# Altium PCB PCB1.PcbDoc
Units mm, origin at the board's own origin, x right, y up, seen from the top; angles counter-clockwise.
Board outline 132.33 x 70 mm, 4 copper layers (Top Layer, Int1 (GND), Int2 (PWR), Bottom Layer), stack 1.369 mm thick; 21 components, 21 nets, 100 pads, 4 vias.
Unrouted connection lines stored in the file: 185.
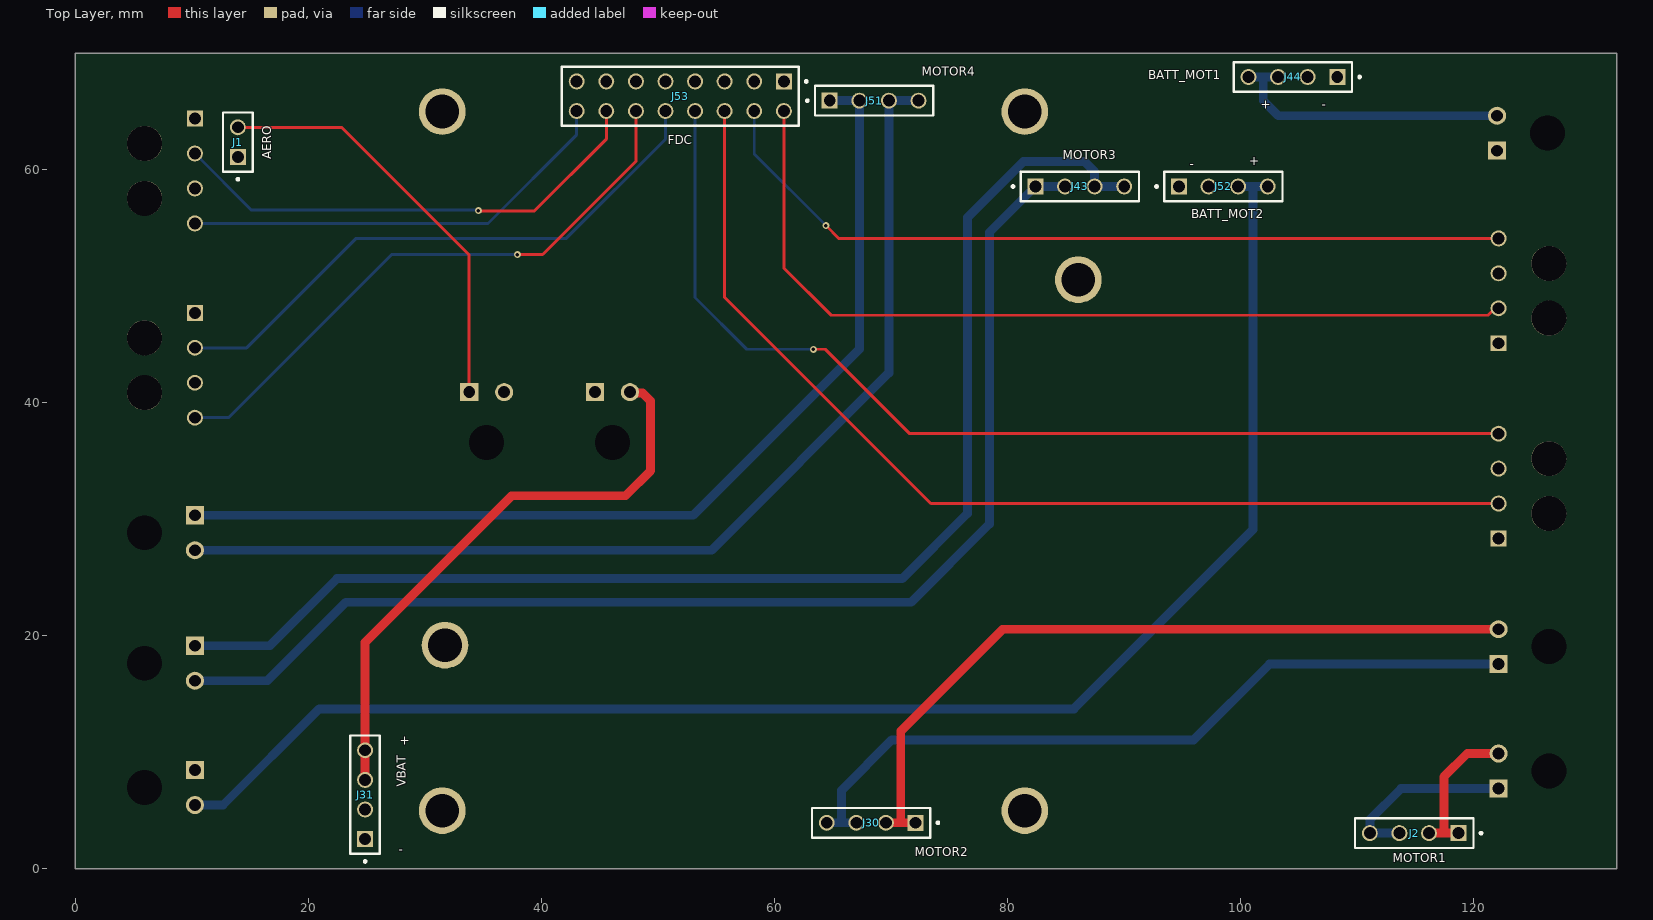
[diagram p0: Top Layer view]
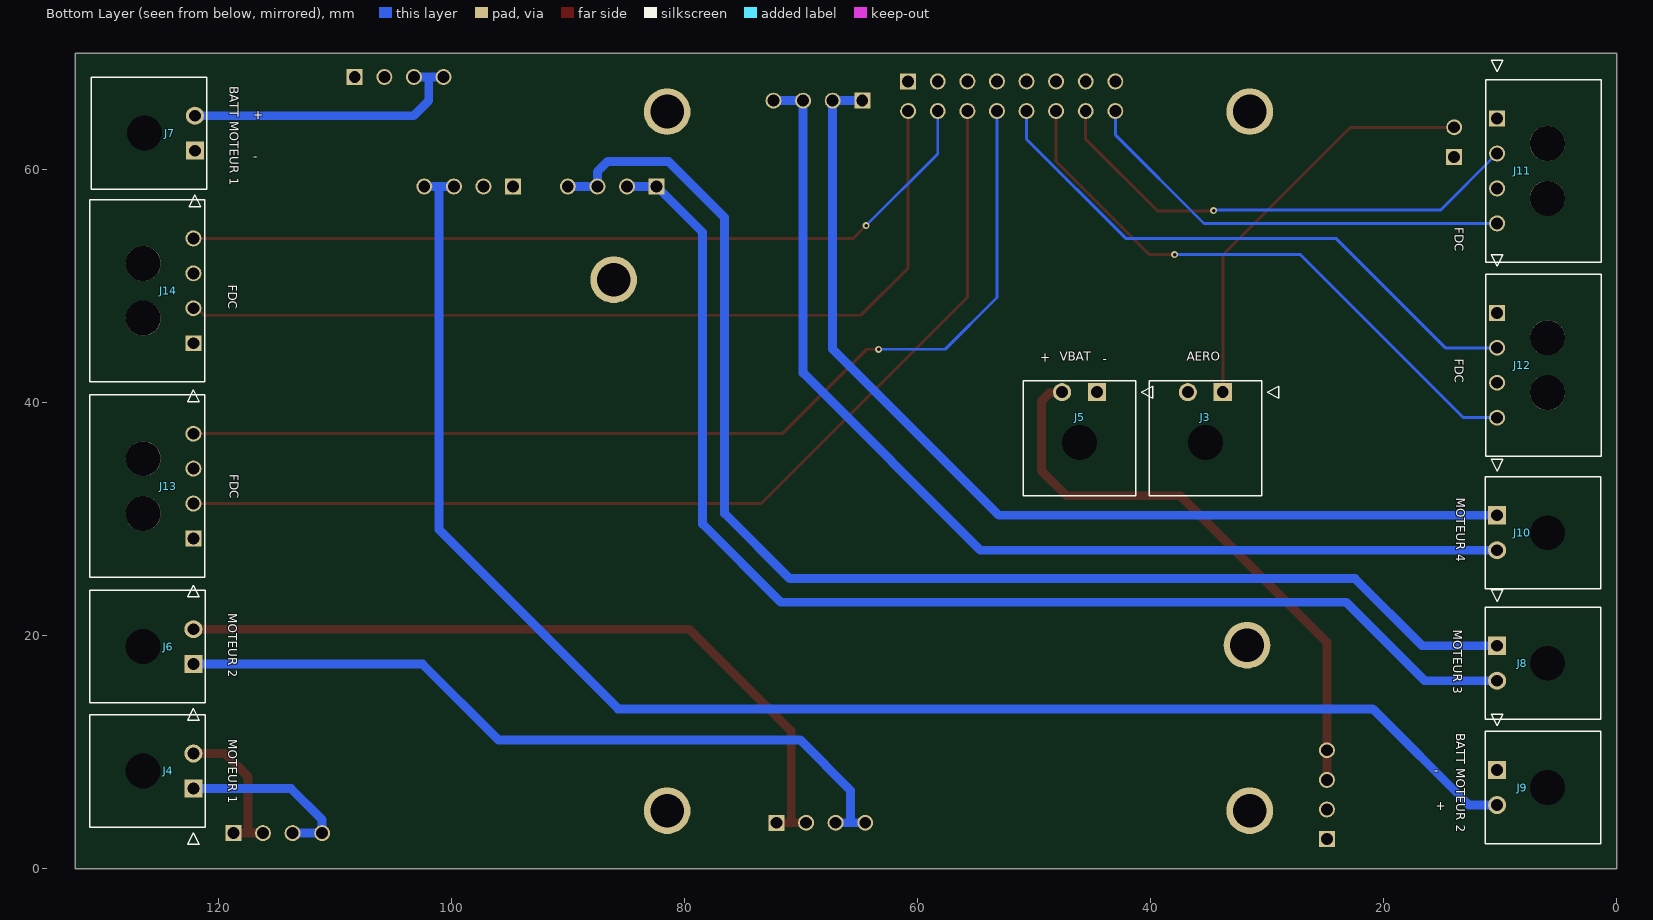
[diagram p1: Bottom Layer view, seen from below]
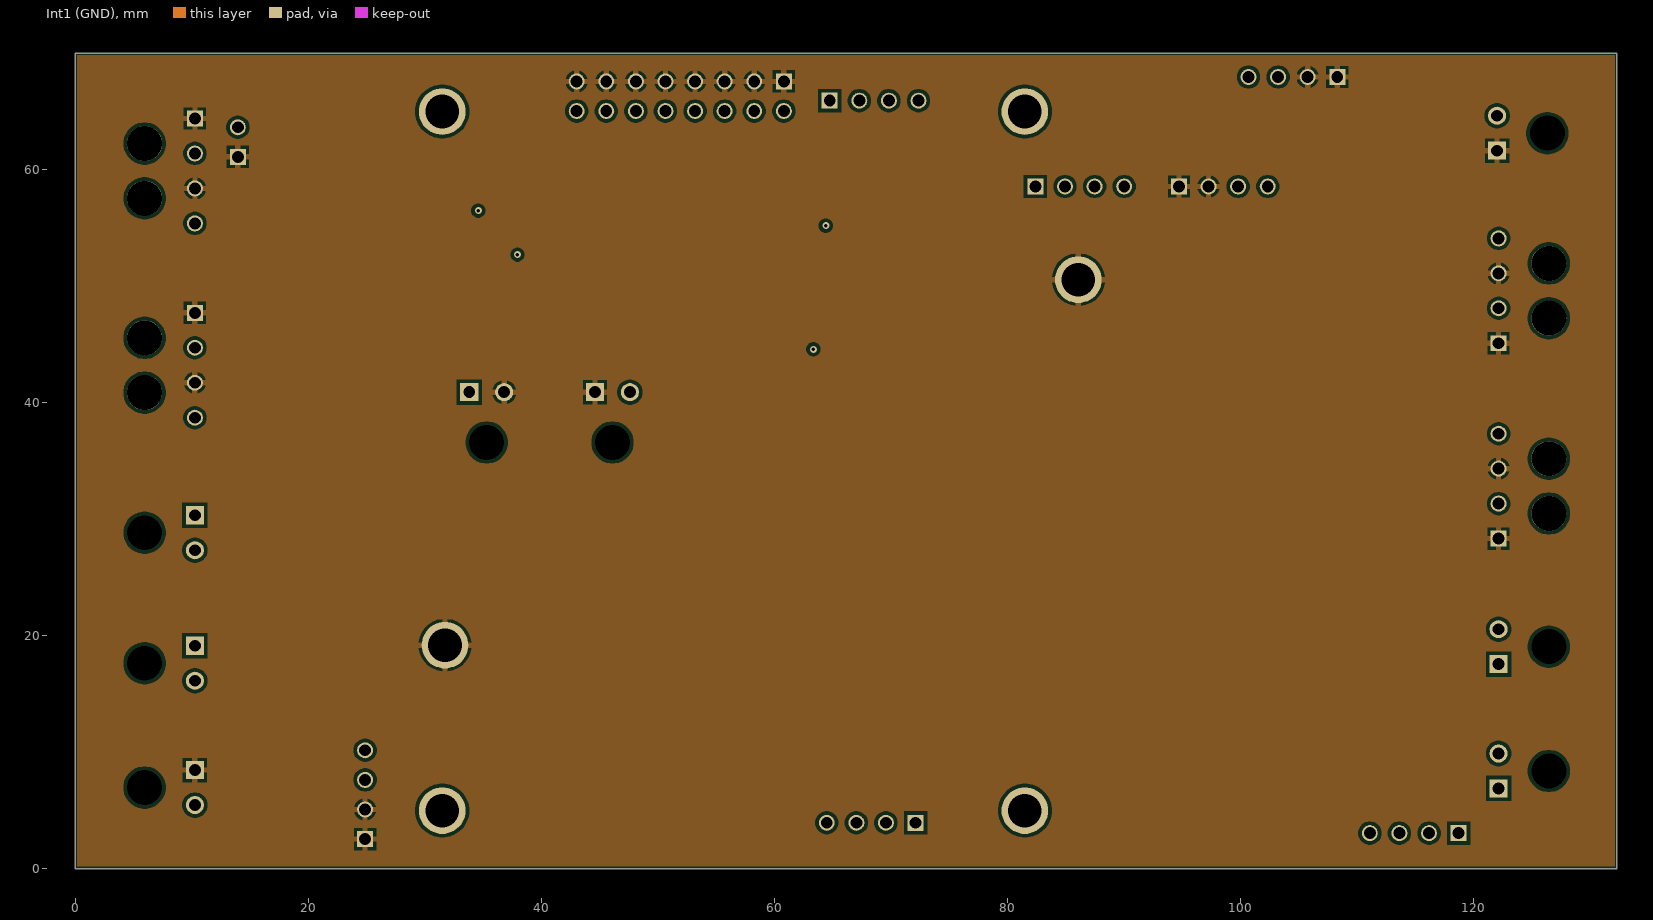
[diagram p2: Int1 (GND)]
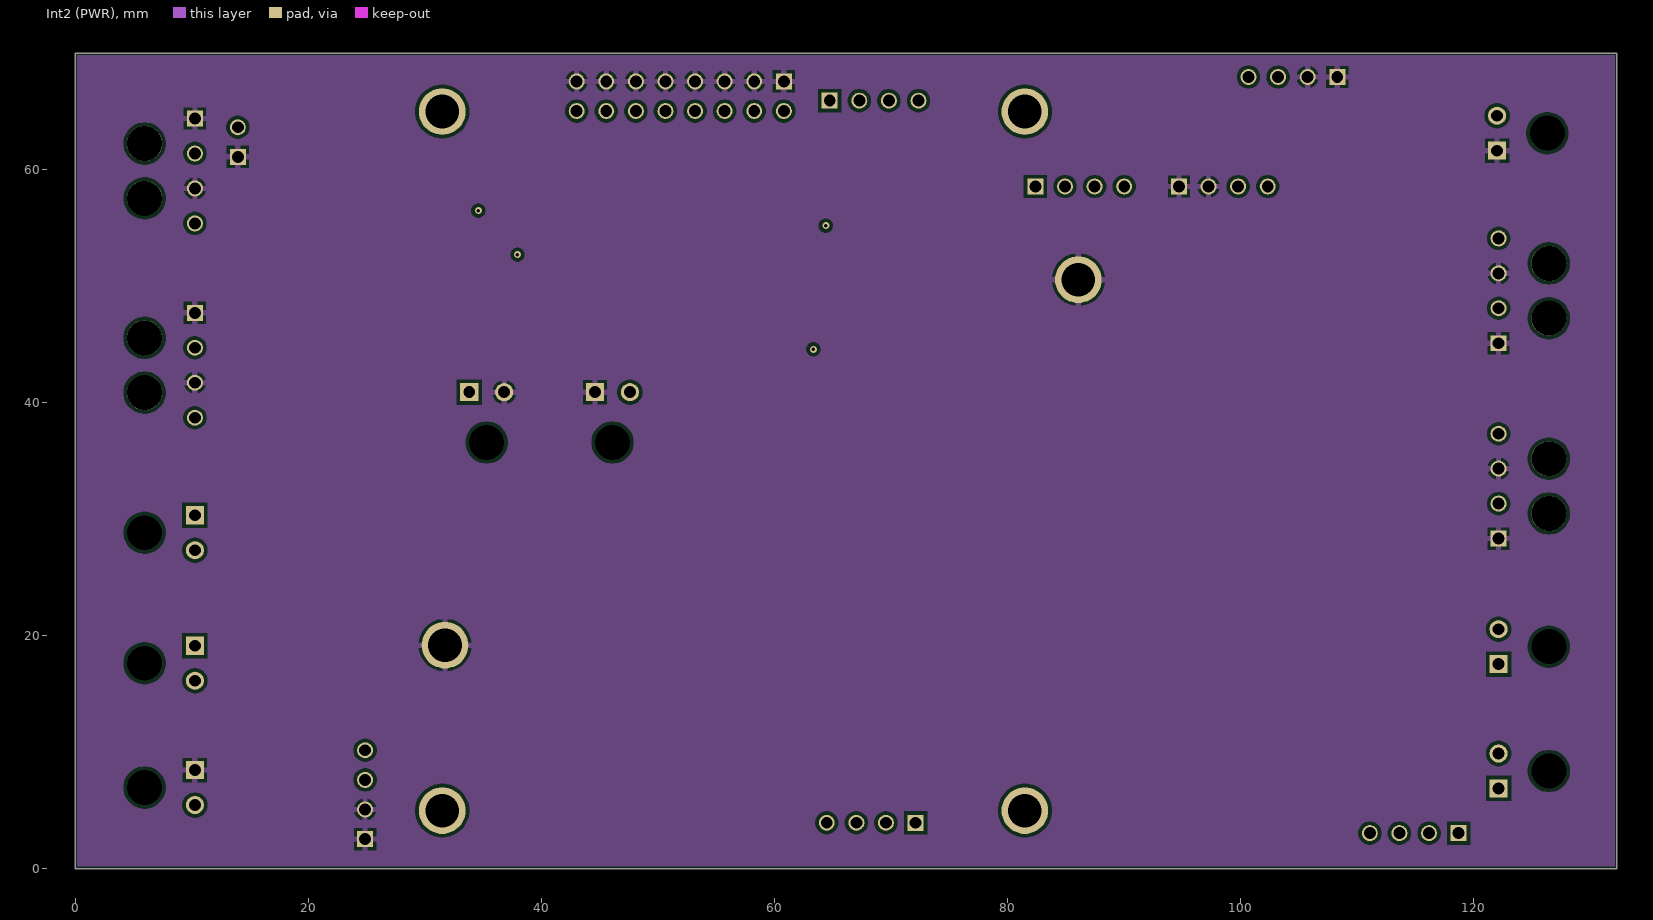
[diagram p3: Int2 (PWR)]
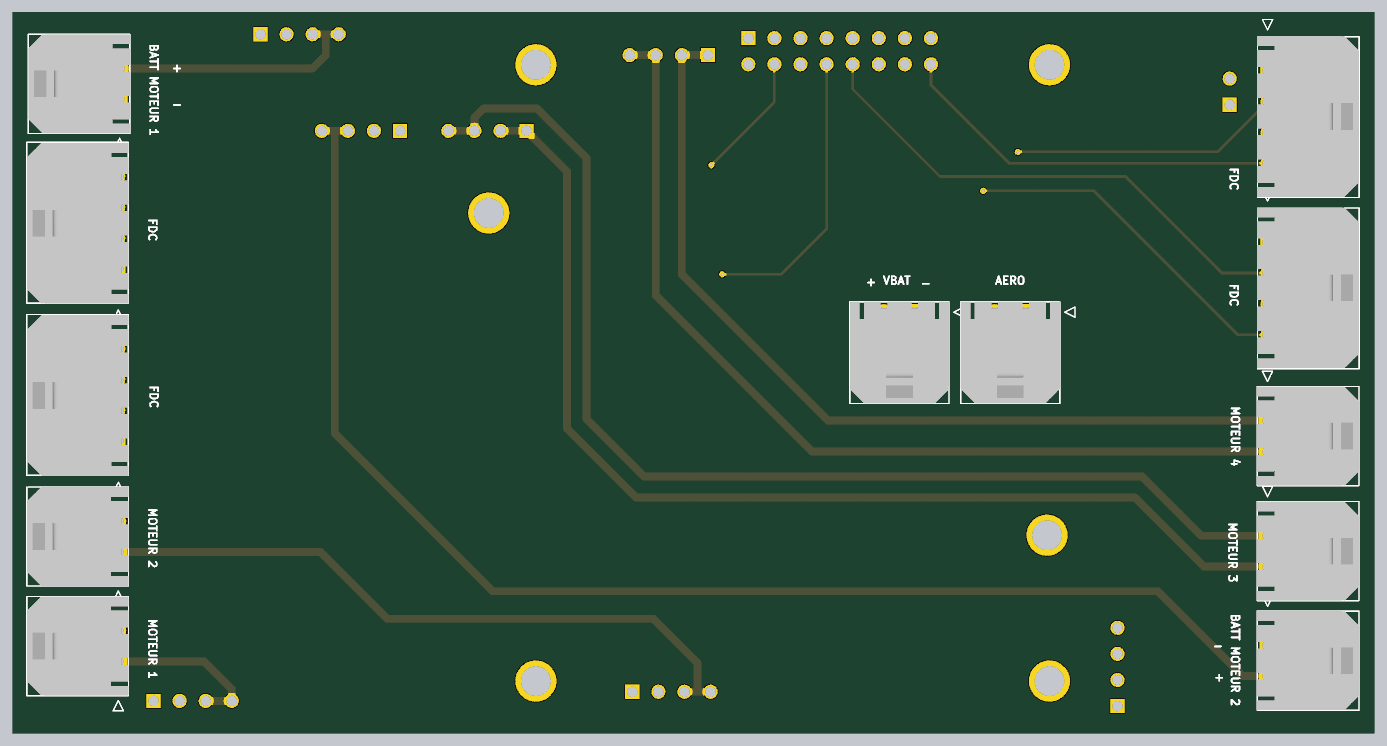
[diagram p4: 3D render of the assembled board from below, using the file's embedded part models]

## Layer stack, top to bottom
Top Solder: solder mask 0.0254, SM-001, Dk 4
Top Layer: signal copper 0.035
Dielectric 1: prepreg 0.1295, PP-017, Dk 4.3
Dielectric 2: prepreg 0.1295, PP-017, Dk 4.3
Int1 (GND): signal copper 0.035
Dielectric 3: core 0.7112, Core-039, Dk 4.8
Int2 (PWR): signal copper 0.035
Dielectric 4: prepreg 0.1295, PP-017, Dk 4.3
Dielectric 5: prepreg 0.1295, PP-017, Dk 4.3
Bottom Layer: signal copper 0.035
Bottom Solder: solder mask 0.0254, SM-001, Dk 4

## Board outline
0,0 0,70 132.334,70 132.334,0

## Design rules (kind name [scope] priority, off if disabled: settings)
BoardOutlineClearance [All] p1: gap=0.2 ignorepadtopadclearanceinfootprint=FALSE
Clearance HF_1 [InNetClass('HF')] p1: gap=0.3 ignorepadtopadclearanceinfootprint=TRUE except(0.127: SMDPad-SMDPad; 0.2: Arc-Arc Arc-Track Arc-SMDPad Arc-THPad Track-Track Track-SMDPad Track-THPad; 0.254: Arc-Via Track-Via; 0.33: Arc-Hole Track-Hole; 0.5: THPad-THPad)
Clearance [All] p2: gap=0.3 ignorepadtopadclearanceinfootprint=TRUE except(0.089: Arc-Arc Arc-Track Track-Track; 0.127: SMDPad-SMDPad; 0.2: Arc-SMDPad Arc-THPad Track-SMDPad Track-THPad; 0.254: Arc-Via Track-Via; 0.33: Arc-Hole Track-Hole; 0.5: THPad-THPad)
DiffPairsRouting [All] p1 off: maxlimit=0.254 minlimit=0.254 mostfreqgap=0.254 toplayer_minwidth=0.381 toplayer_maxwidth=0.381 toplayer_prefwidth=0.381 midlayer1_minwidth=0.381 midlayer1_maxwidth=0.381 midlayer1_prefwidth=0.381 midlayer3_minwidth=0.381 midlayer3_maxwidth=0.381 midlayer3_prefwidth=0.381 bottomlayer_minwidth=0.381 bottomlayer_maxwidth=0.381 bottomlayer_prefwidth=0.381 maxuncoupledlength=12.7
HoleSize [All] p1: absolutevalues=TRUE maxlimit=6.3 minlimit=0.2 maxpercent=80.000 minpercent=20.000
HoleToHoleClearance [All] p1: gap=0.5 allowstackedmicrovias=TRUE
MatchedLengths MatchLengths_xSignals_U4_U3 [InxSignalClass('xSignals_U4_U3_MatchLengthsClass')] p1: tolerance=2.54 checknetsindiffpair=FALSE checkdiffpairvsdiffpair=TRUE checkxsignals=TRUE checkothers=TRUE
MatchedLengths MatchLengths_xSignals_P1_U4 [InxSignalClass('xSignals_P1_U4_MatchLengthsClass')] p2: tolerance=2.54 checknetsindiffpair=FALSE checkdiffpairvsdiffpair=TRUE checkxsignals=TRUE checkothers=TRUE
MatchedLengths MatchLengths_xSignals_U4_U5 [InxSignalClass('xSignals_U4_U5_MatchLengthsClass')] p3: tolerance=2.54 checknetsindiffpair=FALSE checkdiffpairvsdiffpair=TRUE checkxsignals=TRUE checkothers=TRUE
MatchedLengths MatchLengths_xSignals_U11_U4_2 [InxSignalClass('xSignals_U11_U4_MatchLengthsClass_2')] p4: tolerance=2.54 checknetsindiffpair=FALSE checkdiffpairvsdiffpair=TRUE checkxsignals=TRUE checkothers=TRUE
MatchedLengths MatchLengths_xSignals_U11_U4_1 [InxSignalClass('xSignals_U11_U4_MatchLengthsClass_1')] p5: tolerance=2.54 checknetsindiffpair=FALSE checkdiffpairvsdiffpair=TRUE checkxsignals=TRUE checkothers=TRUE
MatchedLengths MatchLengths_xSignals_U11_U4 [InxSignalClass('xSignals_U11_U4_MatchLengthsClass')] p6: tolerance=2 checknetsindiffpair=FALSE checkdiffpairvsdiffpair=TRUE checkxsignals=TRUE checkothers=TRUE
MatchedLengths MatchLengths_xSignals_J79_U4 [InxSignalClass('xSignals_J79_U4_MatchLengthsClass')] p7: tolerance=2 checknetsindiffpair=FALSE checkdiffpairvsdiffpair=TRUE checkxsignals=TRUE checkothers=TRUE
MatchedLengths MatchLengths_xSignals_U2_U4 [InxSignalClass('xSignals_U2_U4_MatchLengthsClass')] p8: tolerance=2 checknetsindiffpair=FALSE checkdiffpairvsdiffpair=TRUE checkxsignals=TRUE checkothers=TRUE
MatchedLengths MatchLengths_xSignals_SD1_U4 [InxSignalClass('xSignals_SD1_U4_MatchLengthsClass')] p9: tolerance=2 checknetsindiffpair=FALSE checkdiffpairvsdiffpair=TRUE checkxsignals=TRUE checkothers=TRUE
MatchedLengths MatchLengths_xSignals_SD_1 [InxSignalClass('xSignals_U3_U4_MatchLengthsClass')] p10: tolerance=2.54 checknetsindiffpair=FALSE checkdiffpairvsdiffpair=TRUE checkxsignals=TRUE checkothers=TRUE usedelayunits=TRUE delaytolerance=50.000000
MatchedLengths MatchLengths_U3_Passives_U4 [InxSignalClass('xSignals_U3_Passives_U4_MatchLengthsClass')] p11: tolerance=1.27 checknetsindiffpair=FALSE checkdiffpairvsdiffpair=TRUE checkxsignals=TRUE checkothers=TRUE
MatchedLengths MatchLengths_xSignals_U3_Passives [InxSignalClass('xSignals_U3_Passives_MatchLengthsClass')] p12: tolerance=1.27 checknetsindiffpair=FALSE checkdiffpairvsdiffpair=TRUE checkxsignals=TRUE checkothers=TRUE
MatchedLengths MatchLengths_xSignals_SD [InxSignalClass('xSignals_SD_MatchLengthsClass')] p13: tolerance=2.54 checknetsindiffpair=FALSE checkdiffpairvsdiffpair=TRUE checkxsignals=TRUE checkothers=TRUE
PlaneConnect [All] p1: planeconnectstyle=Relief reliefexpansion=0.508 reliefentries=4 reliefconductorwidth=0.75 reliefairgap=0.254
PolygonConnect PolygonConnect_1 [InNet('HOT_L_MOTOR1') Or  InNet('HOT_L_MOTOR2') Or  InNet('HOT_L_MOTOR3') Or  InNet('HOT_L_MOTOR4')  Or  InNet('HOT_R_MOTOR1')  Or  InNet('HOT_R_MOTOR2')Or  InNet('HOT_R_MOTOR3') Or  InNet('HOT_R_MOTOR4')Or  InNet('VCC_PWR_MOTOR1')    Or  InNet('VCC_PWR_MOTOR3')] p1: thpad.connectstyle=Direct thpad.reliefconductorwidth=0.5 thpad.reliefentries=4 thpad.polygonreliefangle="90 Angle" thpad.airgapwidth=0.254 smdpad.connectstyle=Direct smdpad.reliefconductorwidth=0.5 smdpad.reliefentries=4 smdpad.polygonreliefangle="90 Angle" smdpad.airgapwidth=0.254 via.connectstyle=Relief via.reliefconductorwidth=0.5 via.reliefentries=4 via.polygonreliefangle="90 Angle" via.airgapwidth=0.254
PolygonConnect [All] p2: connectstyle=Relief reliefconductorwidth=0.5 reliefentries=4 polygonreliefangle="90 Angle" airgapwidth=0.254
RoutingVias [All] p1: holewidth=0.3 width=0.6 viastyle="Through Hole" minholewidth=0.2 minwidth=0.4 maxholewidth=0.3 maxwidth=0.6
SolderMaskExpansion [All] p1: expansion=0.102 istentingtop=FALSE
UnRoutedNet [All] p1: checkbadconnections=TRUE
Width HF [InNetClass('HF')] p1: maxlimit=0.159 minlimit=0.156 preferedwidth=0.159 toplayer_maxwidth=0.156 toplayer_prefwidth=0.156 midlayer1_minwidth=0.159 bottomlayer_maxwidth=0.156 bottomlayer_prefwidth=0.156 impedanceprofiledriven=TRUE minimp=50.000000 maximp=50.000000 favimp=50.000000
Width PWR [InNetClass('PWR')] p2: maxlimit=0.762 minlimit=0.254 preferedwidth=0.762
Width [All] p3: maxlimit=0.254 minlimit=0.089 preferedwidth=0.254
25 further rules are at their usual default settings.

## Classes and differential pairs
net class PWR: +VBAT +VBAT_MOTOR1 +VBAT_MOTOR2 GND MOT1H_CONN MOT1L_CONN MOT2H_CONN MOT2L_CONN MOT3H_CONN MOT3L_CONN MOT4H_CONN MOT4L_CONN

## Components (designator, comment, footprint, x,y, rotation, side; value= is the part's Value field where it differs from the comment)
J1 "TSW-102-05-G-S" SAMTEC_TSW-102-05-G-S 13.97,61.087 r90 top locked
J2 "TSW-104-05-T-S" SAMTEC_TSW-104-05-T-S 118.745,3.048 r180 top locked
J3 "436500200" 4365002YY_4 33.83,40.894 r180 bottom
J4 "436500200" 4365002YY_4 122.172,6.882 r270 bottom
J5 "436500200" 4365002YY_4 44.625,40.894 r180 bottom
J6 "436500200" 4365002YY_4 122.172,17.55 r270 bottom
J7 "436500200" 4365002YY_4 122.045,61.619 r270 bottom
J8 "436500200" 4365002YY_4 10.287,19.129 r90 bottom
J9 "436500200" 4365002YY_4 10.287,8.461 r90 bottom
J10 "436500200" 4365002YY_4 10.289,30.329 r90 bottom
J11 "43650-0400" 43650-04YY_R 10.289,64.381 r90 bottom
J12 "43650-0400" 43650-04YY_R 10.287,47.704 r90 bottom
J13 "43650-0400" 43650-04YY_R 122.172,28.33 r270 bottom
J14 "43650-0400" 43650-04YY_R 122.172,45.094 r270 bottom
J30 "TSW-104-05-T-S" SAMTEC_TSW-104-05-T-S 72.136,3.937 r180 top locked
J31 "TSW-104-05-T-S" SAMTEC_TSW-104-05-T-S 24.892,2.54 r90 top locked
J43 "TSW-104-05-T-S" SAMTEC_TSW-104-05-T-S 82.423,58.547 r0 top locked
J44 "TSW-104-05-T-S" SAMTEC_TSW-104-05-T-S 108.331,67.945 r180 top locked
J51 "TSW-104-05-T-S" SAMTEC_TSW-104-05-T-S 64.77,65.913 r0 top locked
J52 "TSW-104-05-T-S" SAMTEC_TSW-104-05-T-S 94.742,58.547 r0 top locked
J53 "TSW-108-05-G-D" SAMTEC_TSW-108-05-G-D 60.833,67.564 r180 top locked

## Footprints (in the part's own frame and the unit in brackets; to place one, negate y for a bottom-side part, rotate by r counter-clockwise, add the part's x,y. Pads: shape width x height; smd on the part's side, far side on the other; paste and mask are expansions set on the pad)
43650-04YY_R [mm]
  rect 1.37x1.37 hole 1.02: 1(0,0)
  round 1.37 hole 1.02: 2(-3,0) 3(-6,0) 4(-9,0)
  round 3 hole 3 unplated: 5(-2.15,-4.32) 6(-6.85,-4.32)
  silkscreen extent -12.32,-8.92 5,0.98, body extent -12.27,-8.88 3.38,1.02, height 5.47
4365002YY_4 [mm]
  rect 1.55x1.55 hole 1.02: 1(0,0)
  round 1.55 hole 1.02: 2(-3,0)
  round 1.5 hole 3 unplated: 3(-1.5,-4.32)
  silkscreen extent -6.32,-8.9 4.8,1, body extent -6.32,-8.89 3.32,1.01, height 5.68
SAMTEC_TSW-102-05-G-S [mm]
  rect 1.37x1.37 hole 1.02: 01(0,0)
  round 1.37 hole 1.02: 02(2.54,0)
  silkscreen extent -2.02,-1.27 3.81,1.27
SAMTEC_TSW-104-05-T-S [mm]
  rect 1.37x1.37 hole 1.02: 01(0,0)
  round 1.37 hole 1.02: 02(2.54,0) 03(5.08,0) 04(7.62,0)
  silkscreen extent -2.02,-1.27 8.89,1.27
SAMTEC_TSW-108-05-G-D [mm]
  rect 1.37x1.37 hole 1.02: 01(0,0)
  round 1.37 hole 1.02: 02(0,2.54) 03(2.54,0) 04(2.54,2.54) 05(5.08,0) 06(5.08,2.54) 07(7.62,0) 08(7.62,2.54) 09(10.16,0) 10(10.16,2.54) 11(12.7,0) 12(12.7,2.54) 13(15.24,0) 14(15.24,2.54) 15(17.78,0) 16(17.78,2.54)
  silkscreen extent -2.02,-1.27 19.05,3.81

## Part data
J1 J2 J30 J31 J43 J44 J51 J52 J53: Package=None, Availability=Unavailable, Price=None
  J1: MF="{'manufacturer': u'Samtec Inc.'}", MP=TSW-102-05-G-S
  J2 J30 J31 J43 J44 J51 J52: MF="{'manufacturer': u'Samtec'}", MP=TSW-104-05-T-S
  J53: MF="{'manufacturer': u'Samtec'}", MP=TSW-108-05-G-D
J3 J4 J5 J6 J7 J8 J9 J10: "Connector", Manufacturer_Name=Molex, Datasheet Link=https://www.molex.com/pdm_docs/sd/436500200_sd.pdf, Height=13.56mm, Manufacturer_Part_Number=436500200
J11 J12 J13 J14: "Connector", Manufacturer_Name=Molex, Mouser Part Number=538-43650-0400, Datasheet Link=https://www.molex.com/pdm_docs/sd/436500200_sd.pdf, Height=5.57mm, Manufacturer_Part_Number=43650-0400, Mouser Price/Stock=https://www.mouser.co.uk/ProductDetail/Molex/43650-0400?qs=A%252B%2FNCR0PvNV09lp6LzdRYg%3D%3D

## Free pads (board coordinates)
  round 4 hole 2.9: MECA2(31.515,64.977) MECA3(81.515,64.977) MECA6(31.515,4.977) MECA7(81.515,4.977) MECA8(86.106,50.546) MECA9(31.75,19.177)

## Via types
v1: diameter 0.6, hole 0.3, Top Layer to Bottom Layer, 4 vias

## Nets (pads, with @x,y where several pads share a name; then routed paths per layer and width w, separated by ;. In a path a pad name is that pad's centre, name@x,y a point inside that pad or via, vN(x,y) a via of type N, cw(c..) or ccw(c..) an arc to the next point about the centre after c; other vN are vias at no path point)
+VBAT: J5.2 J31.03 J31.04 | length 50.5
  Top Layer w0.762: J31.03 J31.04 24.892,19.431 37.465,32.004 47.244,32.004 49.403,34.163 49.403,40.132 48.727,40.808 47.711,40.808 J5.2
+VBAT_MOTOR1: J7.2 J44.03 J44.04 | length 25.2
  Bottom Layer w0.762: J44.04 101.981,67.945 ; J44.03 101.981,67.945 ; J7.2 103.275,64.619 101.981,65.913 101.981,67.945
+VBAT_MOTOR2: J9.2 J52.03 J52.04 | length 132.6
  Bottom Layer w0.762: J9.2 12.7,5.461 20.955,13.716 85.725,13.716 101.092,29.083 101.092,58.465 101.174,58.547 ; J52.03 99.987,58.547 101.174,58.547 ; J52.04 101.174,58.547
AERO_CON: J1.02 J3.1 | length 36.2
  Top Layer w0.254: J1.02 22.86,63.627 33.83,52.657 J3.1
FDC1_CONN: J11.4 J53.16 | length 37.9
  Bottom Layer w0.254: J11.4 35.442,55.381 43.053,62.992 J53.16
FDC2_CONN: J11.2 J53.14 | length 42.3
  Top Layer w0.254: v1(34.605,56.483) 34.653,56.435 39.417,56.435 45.593,62.611 J53.14
  Bottom Layer w0.254: J11.2 15.155,56.515 34.573,56.515 v1(34.605,56.483)
FDC3_CONN: J12.4 J53.12 | length 51.3
  Top Layer w0.254: v1(37.973,52.705) 40.132,52.705 48.133,60.706 J53.12
  Bottom Layer w0.254: J12.4 13.177,38.704 27.178,52.705 v1(37.973,52.705)
FDC4_CONN: J12.2 J53.10 | length 50.2
  Bottom Layer w0.254: J12.2 14.732,44.704 24.13,54.102 42.164,54.102 50.673,62.611 J53.10
FDC5_CONN: J13.4 J53.08 | length 89.9
  Top Layer w0.254: v1(63.373,44.577) 64.389,44.577 71.636,37.33 J13.4
  Bottom Layer w0.254: J53.08@53.077,65.024 J53.08 53.213,49.022 57.658,44.577 v1(63.373,44.577)
FDC6_CONN: J13.2 J53.06 | length 89.7
  Top Layer w0.254: J53.06 55.753,49.022 73.445,31.33 J13.2
FDC7_CONN: J14.4 J53.04 | length 70.6
  Top Layer w0.254: v1(64.439,55.192) 65.537,54.094 J14.4
  Bottom Layer w0.254: J53.04 58.293,61.341 64.439,55.195 v1(64.439,55.192)
FDC8_CONN: J14.2 J53.02 | length 76.9
  Top Layer w0.254: J53.02 60.833,51.562 64.897,47.498 121.274,47.498 121.87,48.094 J14.2
  Bottom Layer w0.254: J53.02@60.833,64.897 J53.02
GND: J1.01 J3.2 J5.1 J7.1 J9.1 J11.1 J11.3 J12.1 J12.3 J13.1 J13.3 J14.1 J14.3 J31.01 J31.02 J44.01 J44.02 J52.01 J52.02 J53.01 J53.03 J53.05 J53.07 J53.09 J53.11 J53.13 J53.15 pad.MECA8 pad.MECA9
MOT1H_CONN: J2.03 J2.04 J4.1 | length 15.8
  Bottom Layer w0.762: J2.03 J2.04 111.125,4.191 113.816,6.882 J4.1
MOT1L_CONN: J2.01 J2.02 J4.2 | length 12.9
  Top Layer w0.762: J2.02 117.475,3.048 ; J2.01 117.475,3.048 ; J4.2 119.483,9.882 117.475,7.874 117.475,3.048
MOT2H_CONN: J6.1 J30.03 J30.04 | length 66.2
  Bottom Layer w0.762: J30.04 65.786,3.937 ; J30.03 65.786,3.937 ; J6.1 102.513,17.55 96.012,11.049 70.104,11.049 65.786,6.731 65.786,3.937
MOT2L_CONN: J6.2 J30.01 J30.02 | length 65.3
  Top Layer w0.762: J30.02 70.866,3.937 ; J30.01 70.866,3.937 ; J6.2 79.605,20.55 70.866,11.811 70.866,3.937
MOT3H_CONN: J8.1 J43.03 J43.04 | length 113.5
  Bottom Layer w0.762: J8.1 16.716,19.129 22.479,24.892 70.993,24.892 76.581,30.48 76.581,55.88 81.407,60.706 86.614,60.706 87.503,59.817 J43.03 J43.04
MOT3L_CONN: J8.2 J43.01 J43.02 | length 106.9
  Bottom Layer w0.762: J8.2 16.51,16.129 23.241,22.86 71.755,22.86 78.486,29.591 78.486,54.61 J43.01 J43.02
MOT4H_CONN: J10.2 J51.03 J51.04 | length 91.8
  Bottom Layer w0.762: J10.2 54.634,27.329 69.85,42.545 J51.03 J51.04
MOT4L_CONN: J10.1 J51.01 J51.02 | length 86.8
  Bottom Layer w0.762: J10.1 53.062,30.329 67.31,44.577 J51.02 J51.01
pads on no net: J3.3 J4.3 J5.3 J6.3 J7.3 J8.3 J9.3 J10.3 J11.5 J11.6 J12.5 J12.6 J13.5 J13.6 J14.5 J14.6

## Polygon pours and split planes (outlines as drawn)
GND on Int1 (GND) "GND_L02_P000" (solid, remove dead copper, pour order 0): -1.778,72.009 -1.397,72.39 133.096,72.39 133.096,-1.397 131.699,-2.794 -1.27,-2.794
GND on Int2 (PWR) "GND_L03_P001" (solid, remove dead copper, pour order 1): -1.524,71.628 -1.397,71.501 134.366,71.501 134.366,-1.778 134.239,-1.651 -1.778,-1.651

## Silkscreen, mask and mechanical layers (free items; w line width, h text height)
Top Overlay:
  text "MOTOR4" at 72.65,68.048 h0.76
  text "BATT_MOT1" at 92.126,67.742 h0.76
  text "+" at 101.778,65.202 h0.76
  text "-" at 106.985,65.202 h0.76
  text "FDC" at 50.851,62.154 h0.76
  text "AERO" at 16.84,60.884 h0.76 r90
  text "MOTOR3" at 84.76,60.884 h0.76
  text "+" at 100.762,60.376 h0.76
  text "-" at 95.682,60.122 h0.76
  text "BATT_MOT2" at 95.809,55.804 h0.76
  text "+" at 27.854,10.648 h0.76
  text "VBAT" at 28.397,7.036 h0.76 r90
  text "-" at 27.792,1.261 h0.76
  text "MOTOR2" at 72.06,1.067 h0.76
  text "MOTOR1" at 113.081,0.559 h0.76
Bottom Overlay:
  text "BATT MOTEUR 1" at 119.075,67.132 h0.76 r90
  text "+" at 117.043,64.313 h0.76
  text "-" at 117.043,60.757 h0.76
  text "FDC" at 13.919,55.067 h0.76 r90
  text "FDC" at 119.202,50.114 h0.76 r90
  text "FDC" at 13.919,43.764 h0.76 r90
  text "AERO" at 36.906,43.612 h0.76
  text "VBAT" at 47.828,43.612 h0.76
  text "+" at 49.479,43.485 h0.76
  text "-" at 44.145,43.358 h0.76
  text "FDC" at 119.075,33.858 h0.76 r90
  text "MOTEUR 4" at 13.792,31.826 h0.76 r90
  text "MOTEUR 2" at 119.202,21.92 h0.76 r90
  text "MOTEUR 3" at 14.046,20.523 h0.76 r90
  text "BATT MOTEUR 2" at 13.792,11.633 h0.76 r90
  text "MOTEUR 1" at 119.202,11.125 h0.76 r90
  text "-" at 15.697,8.052 h0.76
  text "+" at 15.57,5.004 h0.76
Mechanical 1:
  circle w0.254: c31.75,19.177 r3.5
  circle w0.254: c86.106,50.546 r3.5
  circle w0.254: c81.515,64.977 r3.5
  circle w0.254: c81.515,4.977 r3.5
  circle w0.254: c31.439,4.977 r3.5
  circle w0.254: c31.515,64.977 r3.5
  lines w0.254: -5.512,1.89 -5.004,0.366 ; -5.512,68.819 -5.004,70.343 ; -5.258,0.366 -4.75,0.366 ; -5.258,70.343 -4.75,70.343 ; -5.004,27.33 -5.004,0.366 ; -5.004,43.378 -5.004,70.343 ; -4.496,1.89 -5.004,0.366 ; -4.496,68.819 -5.004,70.343
  text "69.977 (mm)" at -4.089,27.584 h1.52 r90
Mechanical 4:
  the board outline again, w0.254

## Dimensions
31.515,64.977 to 56.642,70.993 on Mechanical 1
31.515,4.977 to 81.515,4.977 on Mechanical 1
31.515,64.977 to 81.515,64.977 on Mechanical 1
0,70 to 132.334,70 on Mechanical 1